# Altium PCB PCB1.PcbDoc (part 1 of 2)
Units mm, origin at the board's own origin, x right, y up, seen from the top; angles counter-clockwise.
Board outline 100 x 70 mm, 4 copper layers (Top Layer, Int1 (GND), Int2 (PWR), Bottom Layer), stack 1.334 mm thick; 109 components, 77 nets, 370 pads, 170 vias.
Unrouted connection lines stored in the file: 2.
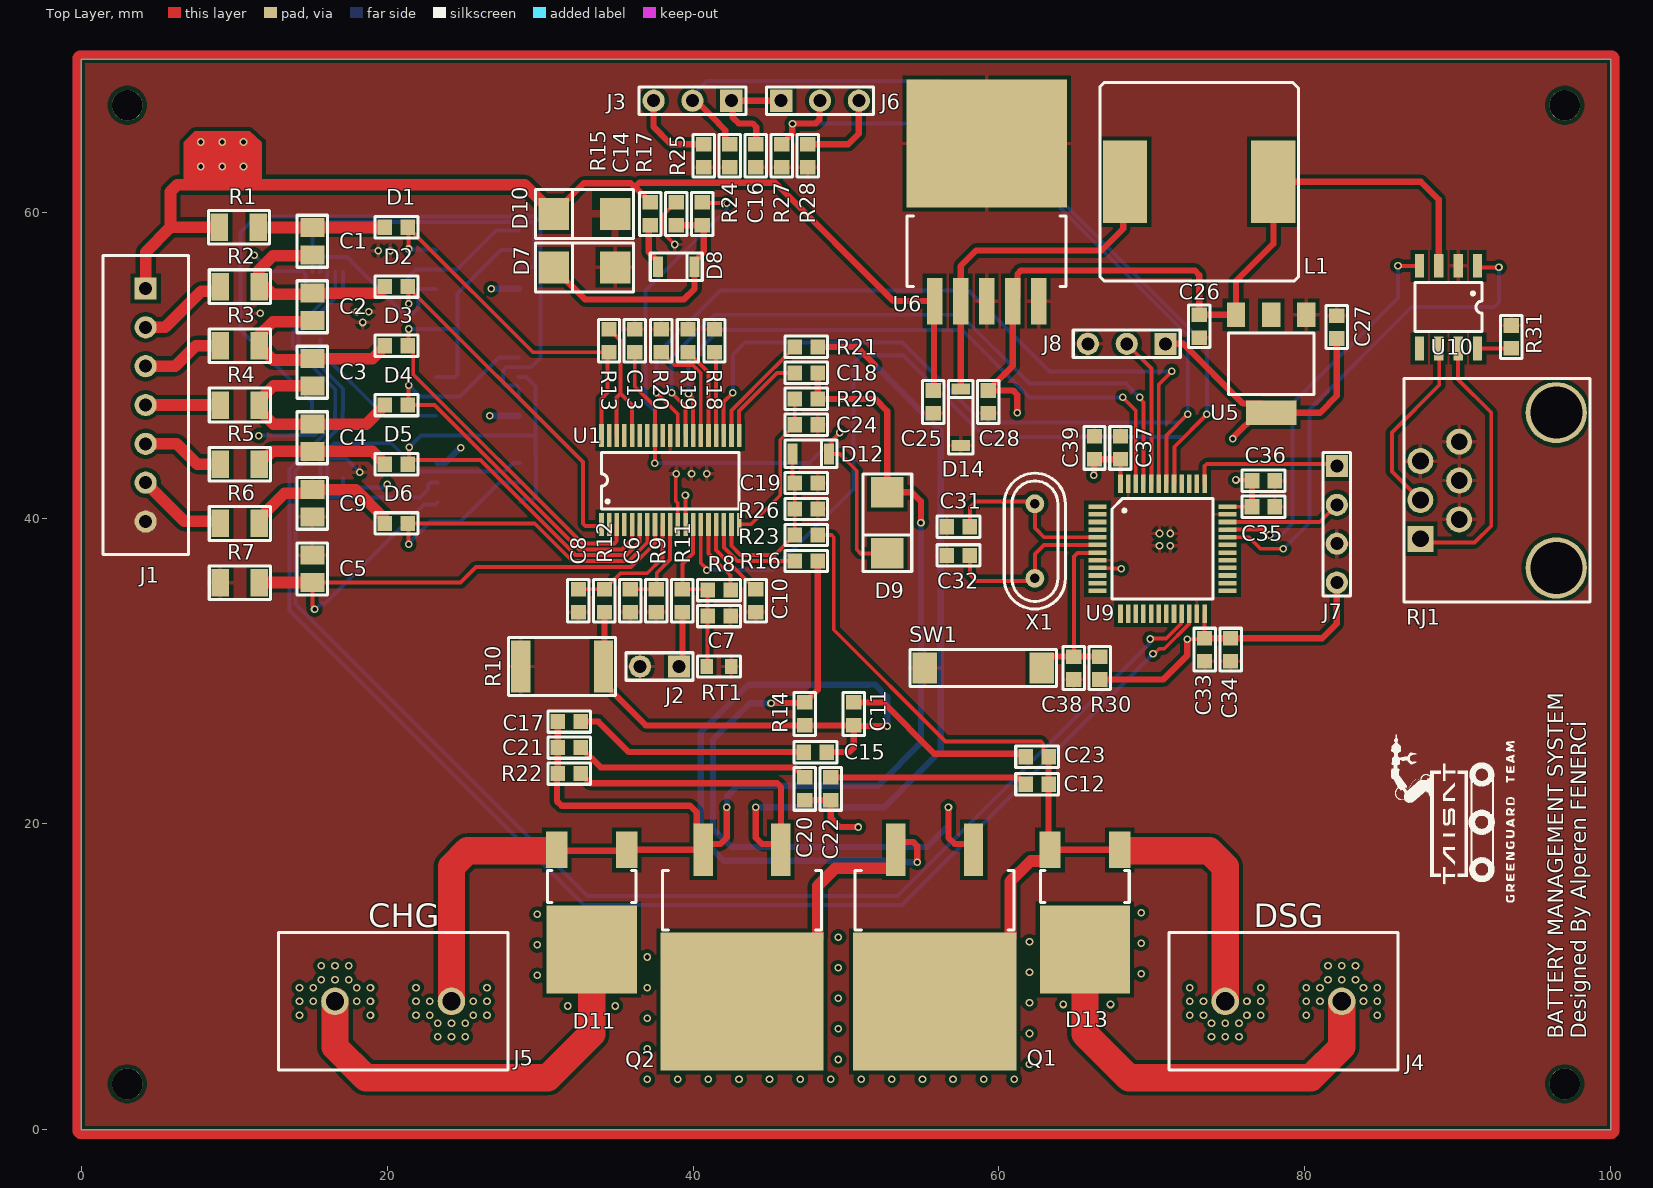
[diagram p0: Top Layer view]
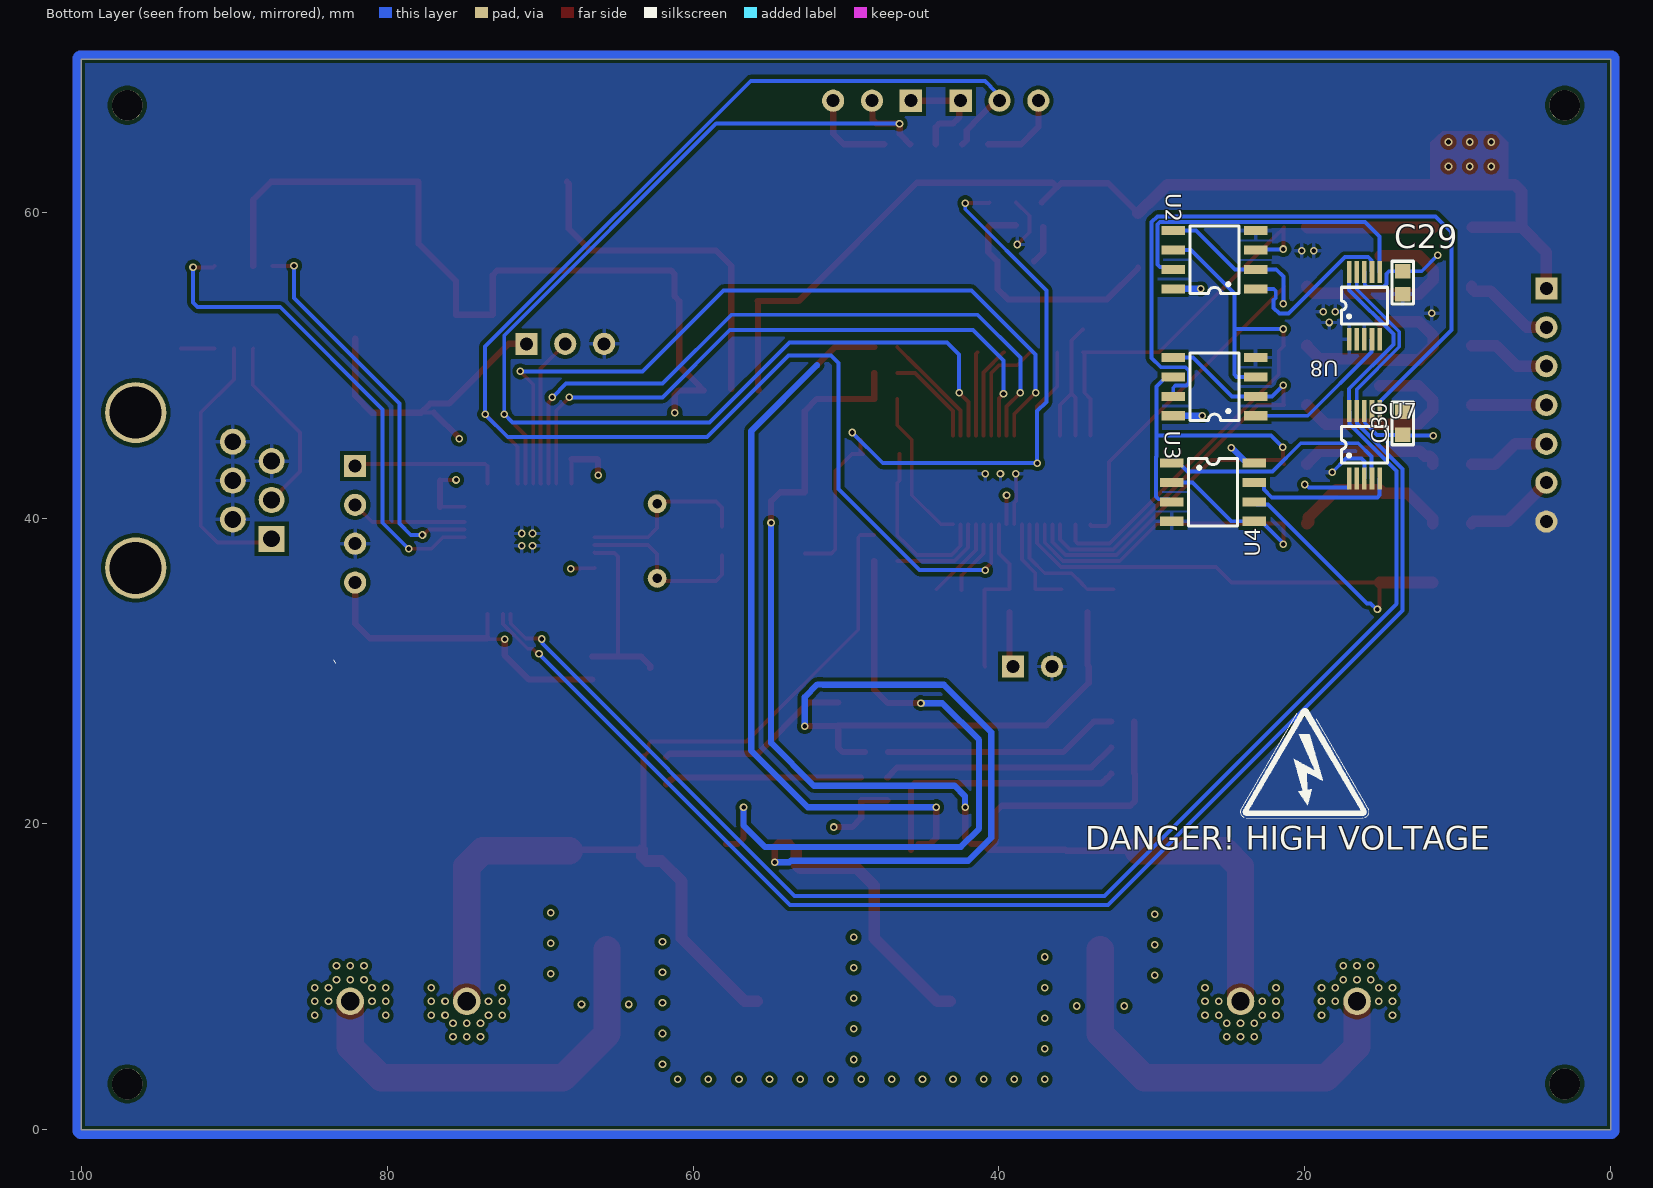
[diagram p1: Bottom Layer view, seen from below]
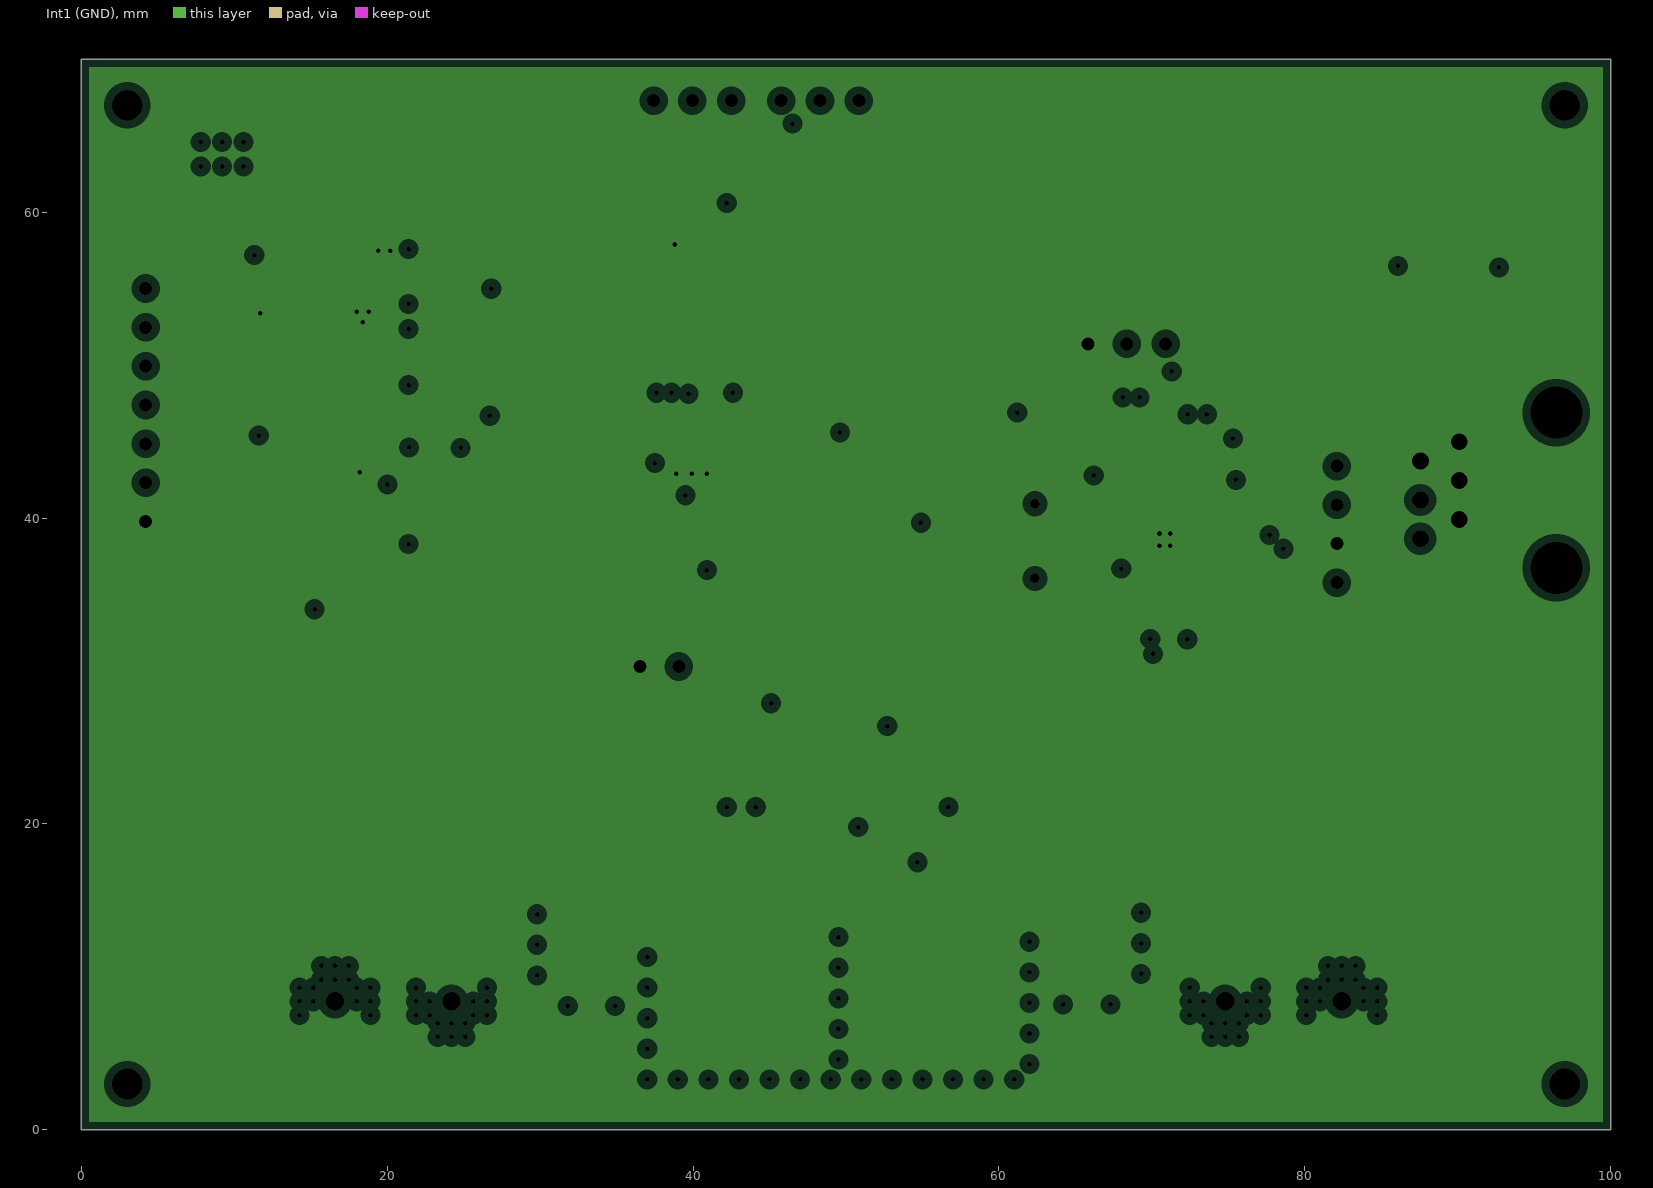
[diagram p2: Int1 (GND), clearances drawn from the general rule]
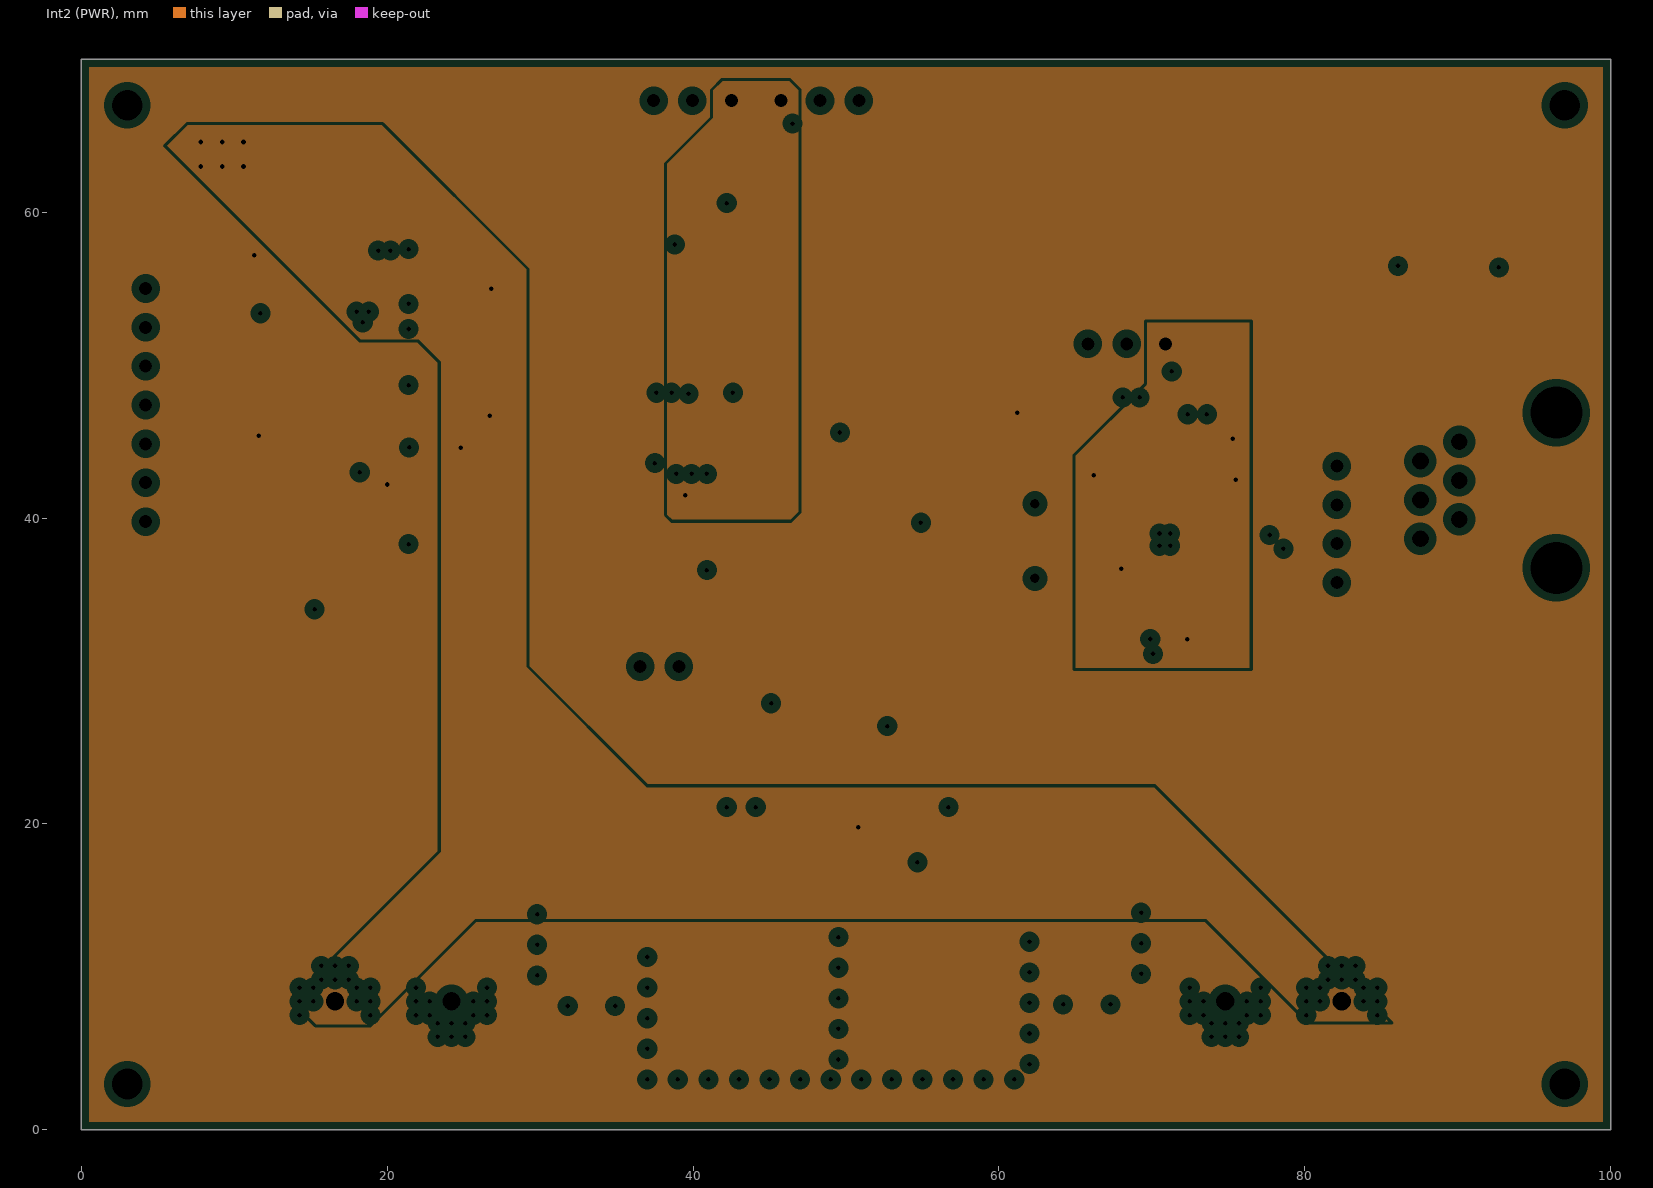
[diagram p3: Int2 (PWR), clearances drawn from the general rule]
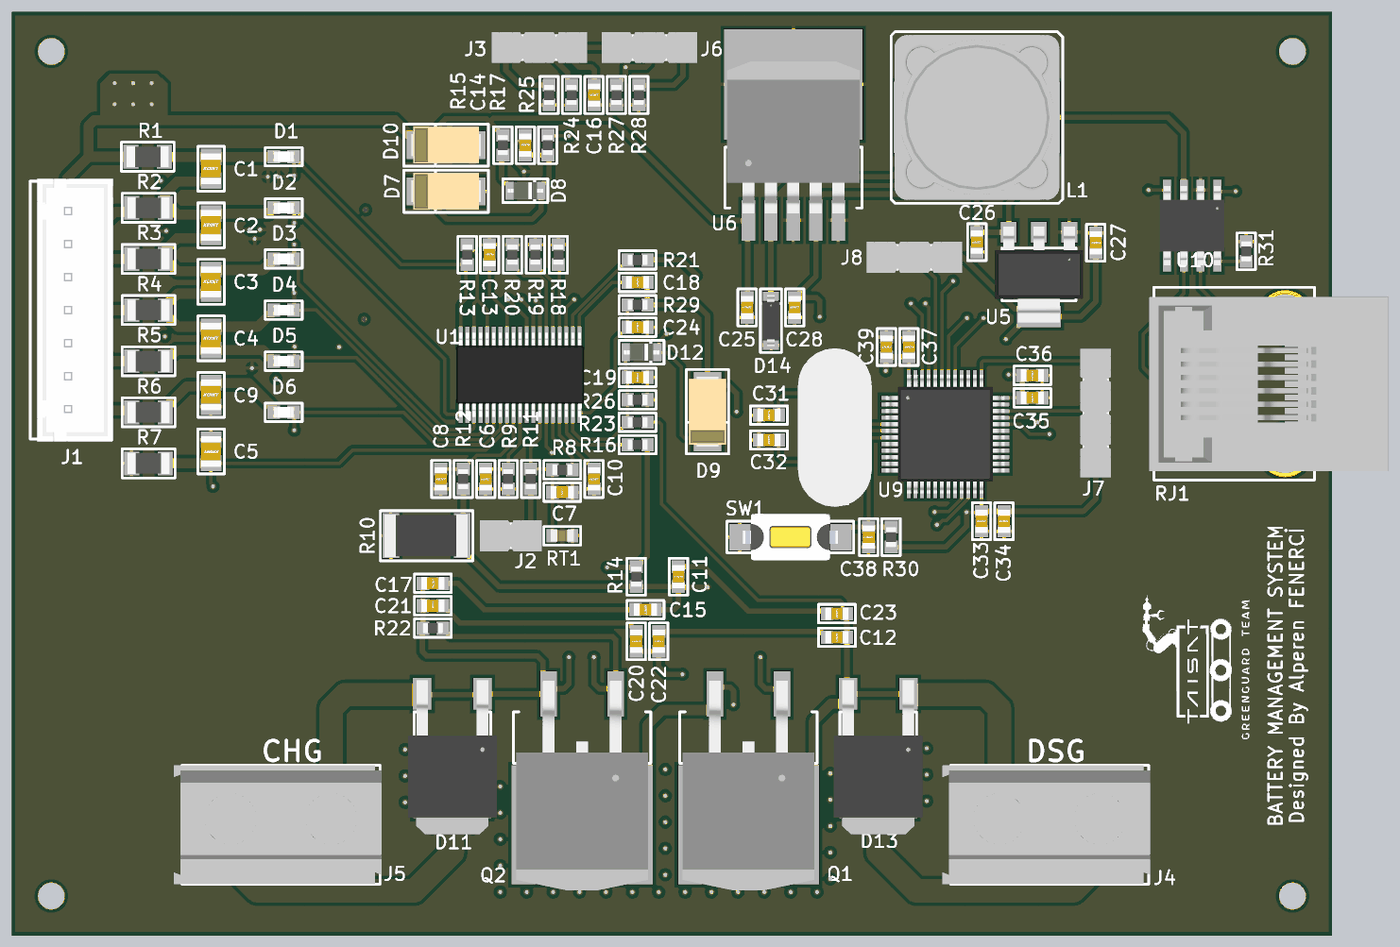
[diagram p4: 3D render of the assembled board from above, using the file's embedded part models]
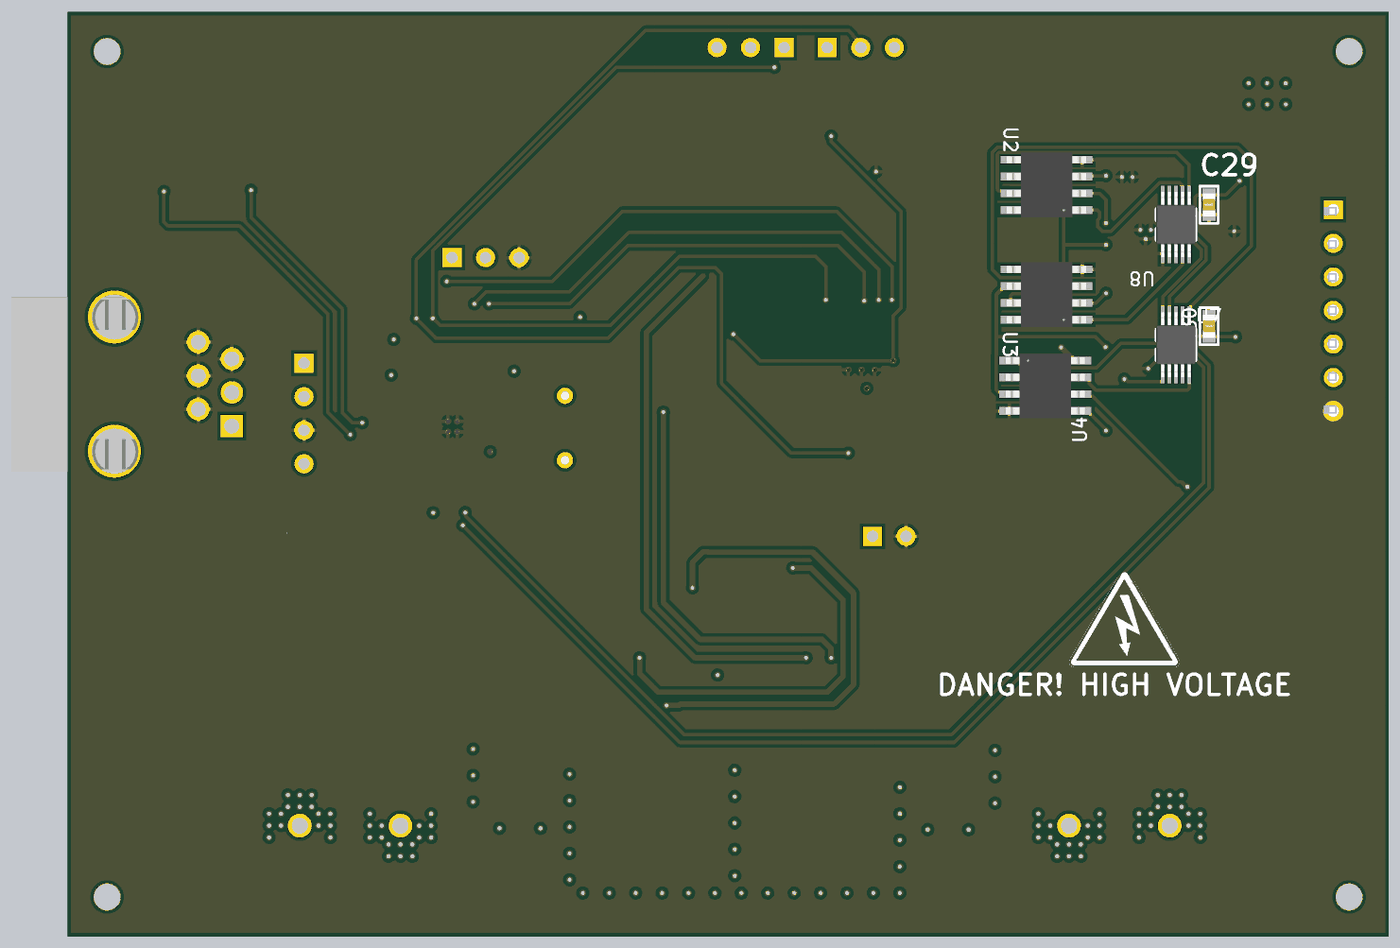
[diagram p5: 3D render of the assembled board from below, using the file's embedded part models]

## Layer stack, top to bottom
Top Solder: solder mask 0.0254, SM-001, Dk 4
Top Layer: signal copper 0.035
Dielectric 1: prepreg 0.1295, PP-017, Dk 4.3
Dielectric 2: prepreg 0.1295, PP-017, Dk 4.3
Int1 (GND): plane copper 0.0175, net GND
Dielectric 3: core 0.7112, Core-039, Dk 4.8
Int2 (PWR): plane copper 0.0175, net 5V
Dielectric 4: prepreg 0.1295, PP-017, Dk 4.3
Dielectric 5: prepreg 0.1295, PP-017, Dk 4.3
Bottom Layer: signal copper 0.035
Bottom Solder: solder mask 0.0254, SM-001, Dk 4

## Board outline
0,0 0,70 100,70 100,0

## Design rules (kind name [scope] priority, off if disabled: settings)
Clearance [All] p1: gap=0.254 ignorepadtopadclearanceinfootprint=TRUE except(0: Arc-Hole Track-Hole SMDPad-Hole THPad-Hole Via-Hole Fill-Hole Poly-Hole Region-Hole Text-Hole; 0.127: Arc-Arc Arc-Track Arc-SMDPad Track-Track Track-SMDPad SMDPad-SMDPad)
DiffPairsRouting [All] p1: maxlimit=0.254 minlimit=0.254 mostfreqgap=0.254 toplayer_minwidth=0.254 toplayer_maxwidth=0.381 toplayer_prefwidth=0.381 bottomlayer_minwidth=0.254 bottomlayer_maxwidth=0.381 bottomlayer_prefwidth=0.381 maxuncoupledlength=12.7
PlaneClearance [All] p1: clearance=0.508
PlaneConnect [All] p1: planeconnectstyle=Relief reliefexpansion=0.508 reliefentries=4 reliefconductorwidth=0.254 reliefairgap=0.254
PolygonConnect [All] p1: connectstyle=Relief reliefconductorwidth=0.254 reliefentries=4 polygonreliefangle="90 Angle" airgapwidth=0.254
RoutingVias [All] p1: holewidth=0.711 width=0.508 viastyle="Through Hole" minholewidth=0.3 minwidth=0.5 maxholewidth=1.016 maxwidth=1.27
SolderMaskExpansion [All] p1: expansion=0.102 istentingtop=FALSE
Width [All] p1: maxlimit=10.16 minlimit=0.254 preferedwidth=0.254 checkconnectedcopper=TRUE
27 further rules are at their usual default settings.

## Classes and differential pairs
component class BMS_MCU: C25 C26 C27 C28 C29 C30 C31 C32 C33 C34 C35 C36 C37 C38 C39 D14 J7 J8 L1 R30 R31 RJ1 SW1 U2 U3 U4 U5 U6 U7 U8 U9 U10 X1
component class BMS_Cell: C1 C2 C3 C4 C5 C6 C7 C8 C9 C10 C11 C12 C13 C14 C15 C16 C17 C18 C19 C20 C21 C22 C23 C24 D1 D2 D3 D4 D5 D6 D7 D8 D9 D10 D11 D12 D13 J1 J2 J3 J4 J5 J6 Q1 Q2 R1 R2 R3 R4 R5 R6 R7 R8 R9 R10 R11 R12 R13 R14 R15 R16 R17 R18 R19 R20 R21 R22 R23 R24 R25 R26 R27 R28 R29 RT1 U1

## Components (designator, comment, footprint, x,y, rotation, side; value= is the part's Value field where it differs from the comment)
C1 "1uF" "CAP 0805" 15.1,58.11 r270 top value=220nF
C2 "1uF" "CAP 0805" 15.1,53.826 r270 top value=220nF
C3 "1uF" "CAP 0805" 15.1,49.542 r270 top value=220nF
C4 "1uF" "CAP 0805" 15.1,45.258 r270 top value=220nF
C5 "1uF" "CAP 0805" 15.1,36.69 r90 top value=220nF
C6 "0.1uF" "CAP 0603" 35.9,34.6 r270 top value=10nF
C7 "10nF" "CAP 0603" 41.7,33.6 r0 top
C8 "0.1uF" "CAP 0603" 32.5,34.6 r270 top value=10nF
C9 "1uF" "CAP 0805" 15.1,40.974 r270 top value=220nF
C10 "1uF" "CAP 0603" 44.1,34.6 r270 top value=10nF
C11 "0.1uF" "CAP 0603" 50.5,27.2 r90 top value=10nF
C12 "0.1uF" "CAP 0603" 62.5,24.4 r180 top value=10nF
C13 "0.1uF" "CAP 0603" 36.187,51.6 r90 top value=10nF
C14 "10uF" "CAP 0603" 38.9,59.9 r90 top value=10nF
C15 "0.1uF" "CAP 0603" 48,24.7 r180 top value=10nF
C16 "4.7uF" "CAP 0603" 44.1,63.7 r270 top value=10nF
C17 "0.1uF" "CAP 0603" 31.9,26.7 r0 top value=10nF
C18 "1uF" "CAP 0603" 47.4,49.5 r0 top value=10nF
C19 "0.1uF" "CAP 0603" 47.4,42.3 r0 top value=10nF
C20 "0.1uF" "CAP 0603" 47.3,22.3 r90 top value=10nF
C21 "0.1uF" "CAP 0603" 31.9,25 r180 top value=10nF
C22 "0.1uF" "CAP 0603" 49,22.3 r90 top value=10nF
C23 "0.1uF" "CAP 0603" 62.5,22.6 r0 top value=10nF
C24 "0.1uF" "CAP 0603" 47.4,46.1 r0 top value=10nF
C25 "100uF" "CAP 0603" 55.7,47.6 r270 top value=10nF
C26 "100nF" "CAP 0603" 73.1,52.55 r270 top value=10nF
C27 "22uF" "CAP 0603" 82.1,52.5 r90 top value=10nF
C28 "330uF" "CAP 0603" 59.3,47.6 r270 top value=10nF
C29 "0.1uF" "CAP 0603" 13.6,55.4 r270 bottom value=10nF
C30 "0.1uF" "CAP 0603" 13.6,46.2 r90 bottom value=10nF
C31 "0.1uF" "CAP 0603" 57.35,39.44 r180 top value=10nF
C32 "0.1uF" "CAP 0603" 57.35,37.56 r180 top value=10nF
C33 "0.1uF" "CAP 0603" 73.45,31.4 r270 top value=10nF
C34 "0.1uF" "CAP 0603" 75.15,31.4 r270 top value=10nF
C35 "0.1uF" "CAP 0603" 77.3,40.75 r0 top value=10nF
C36 "0.1uF" "CAP 0603" 77.3,42.45 r0 top value=10nF
C37 "0.1uF" "CAP 0603" 67.95,44.6 r90 top value=10nF
C38 "0.1uF" "CAP 0603" 64.9,30.2 r270 top value=10nF
C39 "0.1uF" "CAP 0603" 66.25,44.6 r90 top value=10nF
D1 "LTW-C191TLA" "LED 0603" 20.6,59.02 r180 top
D2 "LTW-C191TLA" "LED 0603" 20.6,55.147 r180 top
D3 "LTW-C191TLA" "LED 0603" 20.6,51.273 r180 top
D4 "LTW-C191TLA" "LED 0603" 20.6,47.4 r180 top
D5 "LTW-C191TLA" "LED 0603" 20.6,43.527 r180 top
D6 "LTW-C191TLA" "LED 0603" 20.6,39.653 r180 top
D7 "SMAJ36A-HT" DO214AC 32.9,56.4 r0 top
D8 "1N4148WS-HT" SOD323 38.9,56.45 r180 top
D9 "SMAJ36A-HT" DO214AC 52.7,39.7 r90 top
D10 "SMAJ36A-HT" DO214AC 32.9,59.9 r0 top
D11 "BYQ28ED" DPAK 33.375,15.052 r180 top
D12 "1N4148WS-HT" SOD323 47.7,44.2 r180 top
D13 "BYQ28ED" DPAK 65.625,15.052 r180 top
D14 "1N5819HW-7-F" SOD123 57.5,46.6 r270 top
J1 "JST-XH-7" JST-XH-7 4.2,47.4 r270 top locked
J2 "146285-2" "HEADER 1x2" 37.8,30.3 r180 top
J3 "146285-3" "HEADER 1x3" 39.96,67.3 r180 top
J4 "282845-2" "Terminal 1x2" 78.61,8.4 r0 top
J5 "282845-2" "Terminal 1x2" 20.39,8.4 r0 top
J6 "146285-3" "HEADER 1x3" 48.3,67.3 r0 top
J7 "146285-4" "HEADER 1x4" 82.1,39.6 r270 top
J8 "146285-3" "HEADER 1x3" 68.36,51.4 r180 top
L1 "330uH" "INDUCTOR SMD" 73.1,62 r0 top value=33uH
Q1 "IRF540SPBF" D2PAK-3 55.8,13.357 r180 top
Q2 "IRF540SPBF" D2PAK-3 43.2,13.357 r180 top
R1 "500R" "RESISTOR 1206" 10.3,59.02 r0 top locked value=4.7kR
R2 "500R" "RESISTOR 1206" 10.36,55.147 r0 top locked value=4.7kR
R3 "500R" "RESISTOR 1206" 10.36,51.273 r0 top locked value=4.7kR
R4 "500R" "RESISTOR 1206" 10.36,47.4 r0 top locked value=4.7kR
R5 "500R" "RESISTOR 1206" 10.36,43.527 r0 top locked value=4.7kR
R6 "500R" "RESISTOR 1206" 10.36,39.653 r0 top locked value=4.7kR
R7 "500R" "RESISTOR 1206" 10.36,35.78 r0 top locked value=4.7kR
R8 "10K" "RESISTOR 0603" 41.7,35.3 r180 top value=1kR
R9 "1K" "RESISTOR 0603" 37.6,34.6 r90 top value=1kR
R10 "0.002R Shunt" "RESISTOR 2512" 31.43,30.3 r0 top value=4.7kR
R11 "50R" "RESISTOR 0603" 39.3,34.6 r270 top value=1kR
R12 "1K" "RESISTOR 0603" 34.2,34.6 r90 top value=1kR
R13 "100R" "RESISTOR 0603" 34.5,51.6 r90 top value=1kR
R14 "5.1M" "RESISTOR 0603" 47.3,27.2 r90 top value=1kR
R15 "200R" "RESISTOR 0603" 37.2,59.9 r90 top value=1kR
R16 "1K" "RESISTOR 0603" 47.4,37.2 r180 top value=1kR
R17 "100R" "RESISTOR 0603" 40.6,59.9 r270 top value=1kR
R18 "1K" "RESISTOR 0603" 41.4,51.6 r270 top value=1kR
R19 "1K" "RESISTOR 0603" 39.662,51.6 r270 top value=1kR
R20 "1K" "RESISTOR 0603" 37.925,51.6 r270 top value=1kR
R21 "1K" "RESISTOR 0603" 47.4,51.2 r180 top value=1kR
R22 "5.1M" "RESISTOR 0603" 31.9,23.3 r0 top value=1kR
R23 "100R" "RESISTOR 0603" 47.4,38.9 r180 top value=1kR
R24 "1K" "RESISTOR 0603" 42.4,63.7 r90 top value=1kR
R25 "1K" "RESISTOR 0603" 40.7,63.7 r90 top value=1kR
R26 "47K" "RESISTOR 0603" 47.4,40.6 r180 top value=1kR
R27 "1K" "RESISTOR 0603" 45.8,63.7 r90 top value=1kR
R28 "1K" "RESISTOR 0603" 47.5,63.7 r90 top value=1kR
R29 "100R" "RESISTOR 0603" 47.4,47.8 r180 top value=1kR
R30 "1K" "RESISTOR 0603" 66.6,30.2 r270 top value=1kR
R31 "10K" "RESISTOR 0603" 93.5,51.85 r270 top value=1kR
RJ1 "DS1133-03-S60BX" RJ11,RJ12,RJ14,RJ25 92.005,41.825 r90 top
RT1 "10K" "NTC 0603" 41.7,30.3 r0 top value=10kR
SW1 "DTSMF-31R" "SWITCH 6.00 x 3.5 - 2" 58.975,30.2 r0 top
U1 "BQ77908" TSSOP-38 38.51,42.496 r90 top
U2 "TL3472CDR" SOIC-8 25.9,56.9 r0 bottom
U3 "TL3472CDR" SOIC-8 25.9,48.6 r0 bottom
U4 "TL3472CDR" SOIC-8 26,41.7 r180 bottom
U5 "AMS1117-3V3" SOT223-3 77.8,50.1 r180 top
U6 "LM2575-5V" D2PAK-5 59.2,59.348 r0 top
U7 "ADS1015" VSSOP-10 16.1,44.8 r90 bottom
U8 "ADS1015" VSSOP-10 16.1,53.9 r90 bottom
U9 "STM32F103x8" LQFP48 70.7,38 r270 top
U10 "MCP2551T-I" SOIC-8 89.4,53.8 r270 top
X1 "CRYSTAL" "CRYSTAL THT" 62.35,38.5 r270 top

## Footprints (in the part's own frame and the unit in brackets; to place one, negate y for a bottom-side part, rotate by r counter-clockwise, add the part's x,y. Pads: shape width x height; smd on the part's side, far side on the other; paste and mask are expansions set on the pad)
"CAP 0603" [mm]
  rect 0.95x1 smd mask+0.05: 1(-0.75,0) 2(0.75,0)
  silkscreen extent -1.4,-0.7 1.4,0.7, body extent -0.88,-0.47 0.88,0.48, height 0.95
"CAP 0805" [mm]
  rect 1.24x1.56 smd mask+0.05: 1(-0.89,0) 2(0.89,0)
  silkscreen extent -1.7,-1 1.7,1, body extent -1.18,-0.77 1.17,0.77, height 1.45
"CRYSTAL THT" [mm]
  round 1.23 hole 0.63 mask+0.05: 1(-2.44,0) 2(2.44,0)
  silkscreen extent -4.44,-2 4.44,2, body extent -6,-2.8 6,2.79, height 3.5
D2PAK-3 [mil] "TO263-3"
  rect 49.49x135 smd mask+1.97: 1(-100,-195.17) 2(100,-195.17)
  rect 420x355 smd mask+1.97: 3(0,195.17)
  silkscreen extent -205,-142 205,12, body extent -196,-235 196,390, height 191
D2PAK-5 [mm] "TO-263-5"
  rect 1.016x3.05 smd mask+0.05: 1(-3.404,-5.152) 2(-1.702,-5.152) 3(0,-5.152) 4(1.702,-5.152) 5(3.404,-5.152)
  rect 10.49x8.38 smd mask+0.05: 3(0,5.153)
  silkscreen extent -5.2,-4.2 5.2,0.4, body extent -5.02,-4.63 5.02,6.9, height 4.59
DO214AC [mm] "SMA"
  rect 2x2.1 smd mask+0.05: 1(-2,0) 2(2,0)
  silkscreen extent -3.2,-1.6 3.2,1.6, body extent -2.64,-1.4 2.64,1.4, height 2.34
DPAK [mm]
  rect 1.4x2.4 smd mask+0.05: 1(-2.285,-3.263) 3(2.285,-3.263)
  rect 5.9x5.75 smd mask+0.05: 2(0,3.263)
  silkscreen extent -2.9,-1.9 2.9,0.2, body extent -3.37,-4.3 3.37,7.38, height 2.41
"HEADER 1x2" [mm]
  rect 1.45x1.45 hole 0.85 mask+0.05: 1(-1.27,0)
  round 1.45 hole 0.85 mask+0.05: 2(1.27,0)
  silkscreen extent -2.2,-0.9 2.2,0.9, body extent -2.34,-1.17 2.34,1.17, height 4.58
"HEADER 1x3" [mm]
  rect 1.45x1.45 hole 0.85 mask+0.05: 1(-2.54,0)
  round 1.45 hole 0.85 mask+0.05: 2(0,0) 3(2.54,0)
  silkscreen extent -3.5,-0.9 3.5,0.9, body extent -3.61,-1.17 3.61,1.17, height 4.58
"HEADER 1x4" [mm]
  rect 1.45x1.45 hole 0.85 mask+0.05: 1(-3.81,0)
  round 1.45 hole 0.85 mask+0.05: 2(-1.27,0) 3(1.27,0) 4(3.81,0)
  silkscreen extent -4.7,-0.9 4.7,0.9, body extent -4.88,-1.17 4.88,1.17, height 4.58
"INDUCTOR SMD" [mm]
  rect 2.9x5.4 smd mask+0.05: 1(-4.85,0) 2(4.85,0)
  silkscreen extent -6.5,-6.5 6.5,6.5, body extent -6.25,-6.25 6.25,6.25, height 6
JST-XH-7 [mm] "2.54mm"
  rect 1.45x1.45 hole 0.85 mask+0.05: 1(-7.62,0)
  round 1.45 hole 0.85 mask+0.05: 2(-5.08,0) 3(-2.54,0) 4(0,0) 5(2.54,0) 6(5.08,0) 7(7.62,0)
  silkscreen extent -9.77,-2.8 9.77,2.8, body extent -9.95,-2.28 9.95,3.47, height 7
"LED 0603" [mm]
  rect 0.95x1 smd mask+0.05: 1(-0.75,0) 2(0.75,0)
  silkscreen extent -1.4,-0.7 1.4,0.7, body extent -0.8,-0.4 0.8,0.4, height 0.65
LQFP48 [mm]
  rect 0.3x1.2 smd mask+0.05: 1(-2.75,-4.25) 2(-2.25,-4.25) 3(-1.75,-4.25) 4(-1.25,-4.25) 5(-0.75,-4.25) 6(-0.25,-4.25) 7(0.25,-4.25) 8(0.75,-4.25) 9(1.25,-4.25) 10(1.75,-4.25) 11(2.25,-4.25) 12(2.75,-4.25) 25(2.75,4.25) 26(2.25,4.25) 27(1.75,4.25) 28(1.25,4.25) 29(0.75,4.25) 30(0.25,4.25) 31(-0.25,4.25) 32(-0.75,4.25) 33(-1.25,4.25) 34(-1.75,4.25) 35(-2.25,4.25) 36(-2.75,4.25)
  rect 1.2x0.3 smd mask+0.05: 13(4.25,-2.75) 14(4.25,-2.25) 15(4.25,-1.75) 16(4.25,-1.25) 17(4.25,-0.75) 18(4.25,-0.25) 19(4.25,0.25) 20(4.25,0.75) 21(4.25,1.25) 22(4.25,1.75) 23(4.25,2.25) 24(4.25,2.75) 37(-4.25,2.75) 38(-4.25,2.25) 39(-4.25,1.75) 40(-4.25,1.25) 41(-4.25,0.75) 42(-4.25,0.25) 43(-4.25,-0.25) 44(-4.25,-0.75) 45(-4.25,-1.25) 46(-4.25,-1.75) 47(-4.25,-2.25) 48(-4.25,-2.75)
  silkscreen extent -3.3,-3.3 3.3,3.3, body extent -4.5,-4.5 4.5,4.5, height 1.6
"NTC 0603" [mm]
  rect 0.8x1 smd mask+0.05: 1(-0.8,0) 2(0.8,0)
  silkscreen extent -1.4,-0.7 1.4,0.7, body extent -0.88,-0.44 0.88,0.44, height 0.89
"RESISTOR 0603" [mm]
  rect 0.95x1 smd mask+0.05: 1(-0.75,0) 2(0.75,0)
  silkscreen extent -1.4,-0.7 1.4,0.7, body extent -0.76,-0.38 0.76,0.38, height 0.36
"RESISTOR 1206" [mm]
  rect 1.15x1.8 smd mask+0.05: 1(-1.275,0) 2(1.275,0)
  silkscreen extent -2,-1.1 2,1.1, body extent -1.6,-0.8 1.6,0.8, height 0.64
"RESISTOR 2512" [mm]
  rect 1.25x3.4 smd mask+0.05: 1(-2.7,0) 2(2.7,0)
  silkscreen extent -3.5,-1.9 3.5,1.9, body extent -3.2,-1.6 3.1,1.6, height 0.71
RJ11,RJ12,RJ14,RJ25 [mm] "6P6C"
  rect 1.7x1.7 hole 1.1 mask+0.05: 1(-3.175,4.445)
  round 1.7 hole 1.1 mask+0.05: 2(-0.635,4.445) 3(1.905,4.445) 4(-1.905,1.905) 5(0.635,1.905) 6(3.175,1.905)
  round 4 hole 3.4 mask+0.05: ""(-5.08,-4.445) ""(5.08,-4.445)
  silkscreen extent -7.3,-6.66 7.3,5.5, body extent -6.64,-12.26 6.57,5.84, height 11.75
SOD123 [mm]
  rect 0.7x1.2 smd mask+0.05: 1(-1.85,0) 2(1.85,0)
  silkscreen extent -2.4,-0.8 2.4,0.8, body extent -1.92,-0.67 1.92,0.67, height 0.81
SOD323 [mm]
  rect 0.65x1.35 smd mask+0.05: 1(-1.2,0) 2(1.2,0)
  silkscreen extent -1.7,-0.9 1.7,0.9, body extent -1.34,-0.65 1.34,0.65, height 0.94
SOIC-8 [mm]
  rect 1.55x0.6 smd mask+0.05: 1(-2.7,1.905) 2(-2.7,0.635) 3(-2.7,-0.635) 4(-2.7,-1.905) 5(2.7,-1.905) 6(2.7,-0.635) 7(2.7,0.635) 8(2.7,1.905)
  silkscreen extent -1.6,-2.2 1.6,2.2, body extent -3,-2.45 3,2.45, height 1.76
SOT223-3 [mm]
  rect 1.2x1.6 smd mask+0.05: 1(-2.3,-3.2) 2(0,-3.2) 3(2.3,-3.2)
  rect 3.3x1.6 smd mask+0.05: 2(0,3.2)
  silkscreen extent -2.8,-2 2.8,2, body extent -3.35,-3.64 3.35,3.64, height 1.81
"SWITCH 6.00 x 3.5 - 2" [mm]
  rect 1.6x2 smd mask+0.05: 1(-3.825,0) 2(3.825,0)
  silkscreen extent -4.8,-1.2 4.8,1.2, body extent -3.6,-1.76 3.6,1.76, height 4.12
"Terminal 1x2" [mm]
  round 1.8 hole 1.2 mask+0.05: 1(-3.81,0) 2(3.81,0)
  silkscreen extent -7.5,-4.5 7.5,4.5, body extent -8.12,-4.5 7.62,4.5, height 15.5
TSSOP-38 [mm]
  rect 1.5x0.3 smd mask+0.05: 1(-2.9,4.5) 2(-2.9,4) 3(-2.9,3.5) 4(-2.9,3) 5(-2.9,2.5) 6(-2.9,2) 7(-2.9,1.5) 8(-2.9,1) 9(-2.9,0.5) 10(-2.9,0) 11(-2.9,-0.5) 12(-2.9,-1) 13(-2.9,-1.5) 14(-2.9,-2) 15(-2.9,-2.5) 16(-2.9,-3) 17(-2.9,-3.5) 18(-2.9,-4) 19(-2.9,-4.5) 20(2.9,-4.5) 21(2.9,-4) 22(2.9,-3.5) 23(2.9,-3) 24(2.9,-2.5) 25(2.9,-2) 26(2.9,-1.5) 27(2.9,-1) 28(2.9,-0.5) 29(2.9,0) 30(2.9,0.5) 31(2.9,1) 32(2.9,1.5) 33(2.9,2) 34(2.9,2.5) 35(2.9,3) 36(2.9,3.5) 37(2.9,4) 38(2.9,4.5)
  silkscreen extent -1.9,-4.5 1.8,4.5, body extent -3.2,-4.85 3.2,4.85, height 1.13
VSSOP-10 [mm]
  rect 1.45x0.3 smd mask+0.05: 1(-2.2,1) 2(-2.2,0.5) 3(-2.2,0) 4(-2.2,-0.5) 5(-2.2,-1) 6(2.2,-1) 7(2.2,-0.5) 8(2.2,0) 9(2.2,0.5) 10(2.2,1)
  silkscreen extent -1.2,-1.5 1.2,1.5, body extent -2.46,-1.5 2.46,1.5, height 1.11

## Part data
C1 C2 C3 C4 C5 C9: library part "CAP 0805", "Multilayer Ceramic Capacitor", Case Code (Imperial)=0805, Case Code (Metric)=2012, Dielectric=X7R, Dielectric Material=Ceramic, Manufacturer=KEMET, Manufacturer Part Number=C0805C224K5RACTU, Max Operating Temperature=125°C, Min Operating Temperature=-55°C, Package Quantity=4000, Supplier Part Number=80-C0805C224K5R, Temperature Coefficient=30ppm/°C, Tolerance=10%, Voltage=50V, Case/Package=0805, Category="Ceramic Capacitors", Construction=Flat, Created By=Kaptanyum, Depth=1.25mm, Dissipation Factor=2.5%, Height=1.1mm, Lead Free=5697LeadFree, Lead Pitch=0.75mm, Length=2mm, Material=4241ConductorMaterial, Mounting Technology="Surface Mount,PCB", Packaging="Tape and Reel", Pricing="1=0.15, 10=0.084, 50=0.084, 100=0.053, 1000=0.035, 10000=0.026 (USD)", Radiation Hardening=No, Reach SVHC Compliant=No, RoHS=Yes, RoHS Compliant=Yes, Series="SMD Comm X7R", Stock=89467, Supplier=Mouser, Termination=SMD/SMT, Voltage Rating=50V, Voltage Rating (DC)=50V, Width=1.2mm
C6 C7 C8 C10 C11 C12 C13 C14 C15 C16 C17 C18 C19 C20 C21 C22 C23 C24 C25 C26 C27 C28 C29 C30 C31 C32 C33 C34 C35 C36 C37 C38 C39: library part "CAP 0603", "Multilayer Ceramic Capacitor", Case Code (Imperial)=0603, Case Code (Metric)=1608, Dielectric=X7R, Manufacturer=KEMET, Manufacturer Part Number=C0603C103K5RACTU, Max Operating Temperature=125°C, Min Operating Temperature=-55°C, Package Quantity=4000, Supplier Part Number=80-C0603C103K5R, Temperature Coefficient=30ppm/°C, Tolerance=10%, Voltage=50V, Case/Package=0603, Category="Ceramic Capacitors", Construction=Flat, Created By=Kaptanyum, Depth=0.8mm, Dissipation Factor=2.5%, Height=0.8mm, Lead Free=5697LeadFree, Lead Pitch=0.7mm, Length=1.6mm, Material=4241ConductorMaterial, Mounting Technology="PCB,Surface Mount", Packaging="Tape and Reel", Pins=2, Pricing="1=0.1, 10=0.047, 50=0.047, 100=0.026, 1000=0.017, 10000=0.012 (USD)", Radiation Hardening=No, Reach SVHC Compliant=No, RoHS=Yes, RoHS Compliant=Yes, Series=C0603C, Stock=1110922, Supplier=Mouser, Termination=SMD/SMT, Voltage Rating=50V, Voltage Rating (DC)=50V, Width=0.8mm
D1 D2 D3 D4 D5 D6: library part "LED 0603", "Chip LED", Case Code (Imperial)=0603, Case Code (Metric)=1608, Color=Green, Forward Current=30mA, Forward Voltage=2.1V, Lens Color=Colorless, Manufacturer="Vishay Lite-On", Manufacturer Part Number=LTST-C190GKT, Max Operating Temperature=85°C, Min Operating Temperature=-55°C, Package Quantity=1, Power Dissipation=100mW, Reverse Voltage=5V, Test Current=10mA, Voltage=2V, Case/Package=0603, Category=LEDs, ComponentLink1Description=https://datasheet.ciiva.com/2109/ltst-c190gkt-2109985.pdf?src-supplier=Digi-Key, ComponentLink1URL=https://datasheet.ciiva.com/2109/ltst-c190gkt-2109985.pdf?src-supplier=Digi-Key, ComponentLink2Description=https://datasheet.ciiva.com/11775/0900766b80dc02a6-11775616.pdf?src-supplier=Rs, ComponentLink2URL=https://datasheet.ciiva.com/11775/0900766b80dc02a6-11775616.pdf?src-supplier=Rs, ComponentLink3Description=https://datasheet.ciiva.com/12403/lite-on-ltst-c190gkt-187204-12403884.pdf?src-supplier=Mouser, ComponentLink3URL=https://datasheet.ciiva.com/12403/lite-on-ltst-c190gkt-187204-12403884.pdf?src-supplier=Mouser, ComponentLink4Description=https://datasheet.ciiva.com/16392/lite-on20ltst-c190gkt-16392818.pdf?src-supplier=Future+Electronics, ComponentLink4URL=https://datasheet.ciiva.com/16392/lite-on20ltst-c190gkt-16392818.pdf?src-supplier=Future+Electronics, ComponentLink5Description=https://datasheet.ciiva.com/2109/ltst-c190gkt-2109986.pdf?src-supplier=Digi-Key, ComponentLink5URL=https://datasheet.ciiva.com/2109/ltst-c190gkt-2109986.pdf?src-supplier=Digi-Key, ComponentLink6Description=https://datasheet.ciiva.com/2109/ltst-c190gkt-2109987.pdf?src-supplier=Digi-Key, ComponentLink6URL=https://datasheet.ciiva.com/2109/ltst-c190gkt-2109987.pdf?src-supplier=Digi-Key, Created By=Kaptanyum, Depth=0.8mm, Dominant Wavelength=569nm, Height=0.9mm, Illumination Color=Green, Lead Free="Lead Free", Length=1.6mm, Lens Size=0.8mm, Lens Style=Flat,Diffused,Colorless,Rectangular,Clear, Lens Transparency=Clear, Luminous Intensity=6mcd, Mounting Technology="Surface Mount", Number of Elements=1, Number of LEDs=1, Packaging="Tape and Reel", Pins=2, Power Rating=100mW, Pricing="4000=0.0455, 12000=0.034, 100000=0.0267 (USD)", Radiation Hardening=No, RoHS=Yes, RoHS Compliant=Yes, Series=-, Stock=36000, Supplier="Arrow Electronics", Supplier Part Number=LTST-C190GKT, Viewing Angle=130°, Wavelength=565nm, Width=0.8mm
D7 D9 D10: "Diode TVS 36V", Breakdown Voltage=40V, Case/Package=DO-214AC, Clamping Voltage=58.1V, Manufacturer="Vishay Semiconductors", Manufacturer Part Number=SMAJ36AHE3/61, Max Breakdown Voltage=44.2V, Max Forward Surge Current (Ifsm)=40A, Max Operating Temperature=150°C, Max Power Dissipation=400W, Max Reverse Leakage Current=1uA, Max Surge Current=6.9A, Min Operating Temperature=-55°C, Operating Supply Voltage=36V, Package Quantity=1800, Power Line Protection=No, Supplier Part Number=SMAJ36AHE3/61DKR-ND, Test Current=1mA, Category="TVS Diodes", Clamping Voltage-Max=58.1V, ComponentLink1Description=http://www.mouser.com/ds/2/427/smaj50a-241759.pdf?src-supplier=Mouser, ComponentLink1URL=http://www.mouser.com/ds/2/427/smaj50a-241759.pdf?src-supplier=Mouser, ComponentLink2Description=http://www.vishay.com/docs/88390/smaj50a.pdf?src-supplier=Digi-Key, ComponentLink2URL=http://www.vishay.com/docs/88390/smaj50a.pdf?src-supplier=Digi-Key, ComponentLink3Description=http://www.vishay.com/docs/88390/88390.pdf?src-supplier=Avnet, ComponentLink3URL=http://www.vishay.com/docs/88390/88390.pdf?src-supplier=Avnet, ComponentLink4Description=http://www.vishay.com/doc?88390?src-supplier=Future+Electronics, ComponentLink4URL=http://www.vishay.com/doc?88390?src-supplier=Future+Electronics, Diode Type=ZENER, Direction=Unidirectional, Lead Free="Lead Free", Min Breakdown Voltage=40V, Number of Channels=1, Number of Unidirectional Channels=1, Packaging="Tape and Reel", Peak Pulse Current=6.9A, Peak Pulse Power=400W, Pins=2, Polarity=Unidirectional, Power Dissipation=400W, Reverse Standoff Voltage=36V, RoHS=Yes, RoHS Compliant=Yes, Series="Automotive, AEC-Q101, TransZorb®", Supplier=Digi-Key, Termination=SMD/SMT
D8 D12: "Diode Switch 75V"
D11 D13: "Diode Array Rectifier", Case/Package=DPAK, Manufacturer="NXP Semiconductors", Manufacturer Part Number=BYQ28ED-200/T3, Max Operating Temperature=150°C, Max Reverse Current=10uA, Max Surge Current=55A, Min Operating Temperature=-40°C, Package Quantity=2500, Reverse Voltage=200V, Supplier Part Number=771-BYQ28ED-200/T3, Category=Uncategorized, ComponentLink1Description=http://www.nxp.com/pip/BYQ28ED-200?src-supplier=Mouser, ComponentLink1URL=http://www.nxp.com/pip/BYQ28ED-200?src-supplier=Mouser, Created By=Kaptanyum, Packaging="Tape and Reel", Recovery Time=25ns, RoHS=Yes, RoHS Compliant=Yes, Supplier=Mouser
D14: "Diode Schottky 40V", Average Rectified Current=1A, Case/Package=SOD-123-2, Forward Voltage=450mV, Manufacturer=Diodes, Max Forward Surge Current (Ifsm)=25A, Max Operating Temperature=125°C, Max Power Dissipation=450mW, Max Repetitive Reverse Voltage (Vrrm)=40V, Max Reverse Current=50uA, Min Operating Temperature=-65°C, Package Quantity=3000, Supplier Part Number=5349287, Category="Rectifier Diodes", ComponentLink1Description=https://datasheet.ciiva.com/27092/1538419-27092484.pdf?src-supplier=Jameco, ComponentLink1URL=https://datasheet.ciiva.com/27092/1538419-27092484.pdf?src-supplier=Jameco, ComponentLink2Description=https://datasheet.ciiva.com/16303/ds30217-16303296.pdf?src-supplier=Future+Electronics, ComponentLink2URL=https://datasheet.ciiva.com/16303/ds30217-16303296.pdf?src-supplier=Future+Electronics, ComponentLink3Description=https://datasheet.ciiva.com/8303/ds30217-8303132.pdf?src-supplier=Avnet, ComponentLink3URL=https://datasheet.ciiva.com/8303/ds30217-8303132.pdf?src-supplier=Avnet, ComponentLink4Description=https://datasheet.ciiva.com/912/ds30217-912802.pdf?src-supplier=Digi-Key, ComponentLink4URL=https://datasheet.ciiva.com/912/ds30217-912802.pdf?src-supplier=Digi-Key, ComponentLink5Description=https://datasheet.ciiva.com/912/ds30217-912803.pdf?src-supplier=Digi-Key, ComponentLink5URL=https://datasheet.ciiva.com/912/ds30217-912803.pdf?src-supplier=Digi-Key, ComponentLink6Description=https://datasheet.ciiva.com/912/ds30217-912801.pdf?src-supplier=Digi-Key, ComponentLink6URL=https://datasheet.ciiva.com/912/ds30217-912801.pdf?src-supplier=Digi-Key, ComponentLink7Description=https://datasheet.ciiva.com/1177/ds30217-1177089.pdf?src-supplier=Element14, ComponentLink7URL=https://datasheet.ciiva.com/1177/ds30217-1177089.pdf?src-supplier=Element14, Created By=Kaptanyum, Current Rating=1A, Forward Current=1A, Height=1.25mm, Lead Free="Lead Free", Length=2.85mm, Manufacturer Part Number=1N5819HW-7-F, Max Reverse Voltage (DC)=40V, Output Current=1A, Packaging="Tape and Reel", Peak Non-Repetitive Surge Current=25A, Pins=2, Polarity=Standard, Pricing="3000=0.0539, 12000=0.0516, 30000=0.0488, 45000=0.0495, 75000=0.0487, 120000=0.0453, 150000=0.0462 (USD)", Radiation Hardening=No, Reach SVHC Compliant=No, Reverse Voltage=40V, RoHS=Yes, RoHS Compliant=Yes, Series=-, Stock=3234000, Supplier="Future Electronics", Termination=SMD/SMT, Voltage Rating (DC)=40V, Weight=0.000353oz, Width=1.7mm
J1: "JST Socket for PCB", Color=Natural, Contact Resistance=20mR, Current Rating=3A, Flammability Rating="UL94 V-0", Housing Color=White, Insulation Resistance=1GR, Manufacturer=JST, Manufacturer Part Number=B4B-XH-A(LF)(SN), Max Operating Temperature=85°C, Max Voltage Rating (AC)=250V, Min Operating Temperature=-25°C, Category="Headers and Wire Housings", ComponentLink1Description=https://datasheet.ciiva.com/16203/b4b-xh-alfsn-16203642.pdf?src-supplier=Future+Electronics, ComponentLink1URL=https://datasheet.ciiva.com/16203/b4b-xh-alfsn-16203642.pdf?src-supplier=Future+Electronics, ComponentLink2Description=https://datasheet.ciiva.com/26894/getdatasheetpartid-455616-26894787.pdf?src-supplier=Verical, ComponentLink2URL=https://datasheet.ciiva.com/26894/getdatasheetpartid-455616-26894787.pdf?src-supplier=Verical, ComponentLink3Description=https://datasheet.ciiva.com/26924/getdatasheetpartid-640571-26924035.pdf?src-supplier=Verical, ComponentLink3URL=https://datasheet.ciiva.com/26924/getdatasheetpartid-640571-26924035.pdf?src-supplier=Verical, ComponentLink4Description=https://datasheet.ciiva.com/726/exh-726404.pdf?src-supplier=Digi-Key, ComponentLink4URL=https://datasheet.ciiva.com/726/exh-726404.pdf?src-supplier=Digi-Key, Connector Type=Header, Contact Finish - Mating=TIN, Contact Material=Brass, Contact Plating=Tin,Lead,Copper, Contact Shape=Square, Contact Type="Male Pin", Created By=Kaptanyum, Depth=5.75mm, Fastening Type=Detent, Gender=Male, Housing Material=Polyamide, Insulation Color=Natural, Insulation Material=Nylon, Lead Free="Lead Free", Lead Pitch=2.5mm, Length=12.4mm, Mated Stacking Heights=9.8mm, Material=Polyamide, Max Current Rating=3A, Max Voltage Rating (DC)=250V, Mounting Technology="Through Hole", Number of Contacts=4, Number of Positions=4, Number of Rows=1, Orientation=Straight, Packaging=Bulk, Pitch=2.5mm, Pricing="1=0.1585, 10=0.1388, 25=0.1373, 50=0.1359, 100=0.0728 (USD)", Reach SVHC Compliant=No, RoHS=Yes, Series=XH, Stock=46264, Supplier="Arrow Electronics", Supplier Part Number=B4B-XH-A(LF)(SN), Termination=Solder, Voltage Rating=250V, Voltage Rating (AC)=250V, Wire/Cable Gauge=22AWG
J2: library part "HEADER 1x2", "Header for PCB", Color=Natural, Contact Resistance=20mR, Current Rating=3A, Flammability Rating="UL94 V-0", Housing Color=White, Insulation Resistance=1GR, Manufacturer=JST, Manufacturer Part Number=B4B-XH-A(LF)(SN), Max Operating Temperature=85°C, Max Voltage Rating (AC)=250V, Min Operating Temperature=-25°C, Category="Headers and Wire Housings", ComponentLink1Description=https://datasheet.ciiva.com/16203/b4b-xh-alfsn-16203642.pdf?src-supplier=Future+Electronics, ComponentLink1URL=https://datasheet.ciiva.com/16203/b4b-xh-alfsn-16203642.pdf?src-supplier=Future+Electronics, ComponentLink2Description=https://datasheet.ciiva.com/26894/getdatasheetpartid-455616-26894787.pdf?src-supplier=Verical, ComponentLink2URL=https://datasheet.ciiva.com/26894/getdatasheetpartid-455616-26894787.pdf?src-supplier=Verical, ComponentLink3Description=https://datasheet.ciiva.com/26924/getdatasheetpartid-640571-26924035.pdf?src-supplier=Verical, ComponentLink3URL=https://datasheet.ciiva.com/26924/getdatasheetpartid-640571-26924035.pdf?src-supplier=Verical, ComponentLink4Description=https://datasheet.ciiva.com/726/exh-726404.pdf?src-supplier=Digi-Key, ComponentLink4URL=https://datasheet.ciiva.com/726/exh-726404.pdf?src-supplier=Digi-Key, Connector Type=Header, Contact Finish - Mating=TIN, Contact Material=Brass, Contact Plating=Tin,Lead,Copper, Contact Shape=Square, Contact Type="Male Pin", Created By=Kaptanyum, Depth=5.75mm, Fastening Type=Detent, Gender=Male, Housing Material=Polyamide, Insulation Color=Natural, Insulation Material=Nylon, Lead Free="Lead Free", Lead Pitch=2.5mm, Length=12.4mm, Mated Stacking Heights=9.8mm, Material=Polyamide, Max Current Rating=3A, Max Voltage Rating (DC)=250V, Mounting Technology="Through Hole", Number of Contacts=4, Number of Positions=4, Number of Rows=1, Orientation=Straight, Packaging=Bulk, Pitch=2.5mm, Pricing="1=0.1585, 10=0.1388, 25=0.1373, 50=0.1359, 100=0.0728 (USD)", Reach SVHC Compliant=No, RoHS=Yes, Series=XH, Stock=46264, Supplier="Arrow Electronics", Supplier Part Number=B4B-XH-A(LF)(SN), Termination=Solder, Voltage Rating=250V, Voltage Rating (AC)=250V, Wire/Cable Gauge=22AWG
J3 J6 J8: library part "HEADER 1x3", "Header for PCB", Color=Natural, Contact Resistance=20mR, Current Rating=3A, Flammability Rating="UL94 V-0", Housing Color=White, Insulation Resistance=1GR, Manufacturer=JST, Manufacturer Part Number=B4B-XH-A(LF)(SN), Max Operating Temperature=85°C, Max Voltage Rating (AC)=250V, Min Operating Temperature=-25°C, Category="Headers and Wire Housings", ComponentLink1Description=https://datasheet.ciiva.com/16203/b4b-xh-alfsn-16203642.pdf?src-supplier=Future+Electronics, ComponentLink1URL=https://datasheet.ciiva.com/16203/b4b-xh-alfsn-16203642.pdf?src-supplier=Future+Electronics, ComponentLink2Description=https://datasheet.ciiva.com/26894/getdatasheetpartid-455616-26894787.pdf?src-supplier=Verical, ComponentLink2URL=https://datasheet.ciiva.com/26894/getdatasheetpartid-455616-26894787.pdf?src-supplier=Verical, ComponentLink3Description=https://datasheet.ciiva.com/26924/getdatasheetpartid-640571-26924035.pdf?src-supplier=Verical, ComponentLink3URL=https://datasheet.ciiva.com/26924/getdatasheetpartid-640571-26924035.pdf?src-supplier=Verical, ComponentLink4Description=https://datasheet.ciiva.com/726/exh-726404.pdf?src-supplier=Digi-Key, ComponentLink4URL=https://datasheet.ciiva.com/726/exh-726404.pdf?src-supplier=Digi-Key, Connector Type=Header, Contact Finish - Mating=TIN, Contact Material=Brass, Contact Plating=Tin,Lead,Copper, Contact Shape=Square, Contact Type="Male Pin", Created By=Kaptanyum, Depth=5.75mm, Fastening Type=Detent, Gender=Male, Housing Material=Polyamide, Insulation Color=Natural, Insulation Material=Nylon, Lead Free="Lead Free", Lead Pitch=2.5mm, Length=12.4mm, Mated Stacking Heights=9.8mm, Material=Polyamide, Max Current Rating=3A, Max Voltage Rating (DC)=250V, Mounting Technology="Through Hole", Number of Contacts=4, Number of Positions=4, Number of Rows=1, Orientation=Straight, Packaging=Bulk, Pitch=2.5mm, Pricing="1=0.1585, 10=0.1388, 25=0.1373, 50=0.1359, 100=0.0728 (USD)", Reach SVHC Compliant=No, RoHS=Yes, Series=XH, Stock=46264, Supplier="Arrow Electronics", Supplier Part Number=B4B-XH-A(LF)(SN), Termination=Solder, Voltage Rating=250V, Voltage Rating (AC)=250V, Wire/Cable Gauge=22AWG
J4 J5: library part "SCREW TERMINAL", "7.62mm 2 POS", Created By=Kaptanyum
J7: library part "HEADER 1x4", "Header for PCB", Color=Natural, Contact Resistance=20mR, Current Rating=3A, Flammability Rating="UL94 V-0", Housing Color=White, Insulation Resistance=1GR, Manufacturer=JST, Manufacturer Part Number=B4B-XH-A(LF)(SN), Max Operating Temperature=85°C, Max Voltage Rating (AC)=250V, Min Operating Temperature=-25°C, Category="Headers and Wire Housings", ComponentLink1Description=https://datasheet.ciiva.com/16203/b4b-xh-alfsn-16203642.pdf?src-supplier=Future+Electronics, ComponentLink1URL=https://datasheet.ciiva.com/16203/b4b-xh-alfsn-16203642.pdf?src-supplier=Future+Electronics, ComponentLink2Description=https://datasheet.ciiva.com/26894/getdatasheetpartid-455616-26894787.pdf?src-supplier=Verical, ComponentLink2URL=https://datasheet.ciiva.com/26894/getdatasheetpartid-455616-26894787.pdf?src-supplier=Verical, ComponentLink3Description=https://datasheet.ciiva.com/26924/getdatasheetpartid-640571-26924035.pdf?src-supplier=Verical, ComponentLink3URL=https://datasheet.ciiva.com/26924/getdatasheetpartid-640571-26924035.pdf?src-supplier=Verical, ComponentLink4Description=https://datasheet.ciiva.com/726/exh-726404.pdf?src-supplier=Digi-Key, ComponentLink4URL=https://datasheet.ciiva.com/726/exh-726404.pdf?src-supplier=Digi-Key, Connector Type=Header, Contact Finish - Mating=TIN, Contact Material=Brass, Contact Plating=Tin,Lead,Copper, Contact Shape=Square, Contact Type="Male Pin", Created By=Kaptanyum, Depth=5.75mm, Fastening Type=Detent, Gender=Male, Housing Material=Polyamide, Insulation Color=Natural, Insulation Material=Nylon, Lead Free="Lead Free", Lead Pitch=2.5mm, Length=12.4mm, Mated Stacking Heights=9.8mm, Material=Polyamide, Max Current Rating=3A, Max Voltage Rating (DC)=250V, Mounting Technology="Through Hole", Number of Contacts=4, Number of Positions=4, Number of Rows=1, Orientation=Straight, Packaging=Bulk, Pitch=2.5mm, Pricing="1=0.1585, 10=0.1388, 25=0.1373, 50=0.1359, 100=0.0728 (USD)", Reach SVHC Compliant=No, RoHS=Yes, Series=XH, Stock=46264, Supplier="Arrow Electronics", Supplier Part Number=B4B-XH-A(LF)(SN), Termination=Solder, Voltage Rating=250V, Voltage Rating (AC)=250V, Wire/Cable Gauge=22AWG
L1: library part "INDUCTOR SMD", "Inductor Power Shielded Wirewound", Current Rating=3A, Inductance Tolerance=20%, Manufacturer=Bourns, Manufacturer Part Number=SRR1260-330M, Max Operating Temperature=125°C, Min Operating Temperature=-40°C, Saturation Current=2.8A, Self Resonant Frequency=9.97MHz, Category="Fixed Inductors", ComponentLink1Description=http://www.farnell.com/datasheets/2251090.pdf?src-supplier=Farnell, ComponentLink1URL=http://www.farnell.com/datasheets/2251090.pdf?src-supplier=Farnell, Created By=Kaptanyum, Packaging=10Packaging, Pins=2NUMBER, Pricing="600=0.4391, 1200=0.4292 (USD)", Q Factor=27NUMBER, RMS Current (Irms)=3A, RoHS=Yes, RoHS Compliant=Yes, Stock=16200, Supplier="Arrow Electronics", Supplier Part Number=SRR1260-330M
Q1 Q2: "MOSFET N-ch, 100V 28A"
R1 R2 R3 R4 R5 R6 R7: library part "RES 1206", "SMD Chip Resistor", Case Code (Imperial)=1206, Case Code (Metric)=3216, Manufacturer=Yageo, Manufacturer Part Number=RC1206FR-074K7L, Max Operating Temperature=155°C, Min Operating Temperature=-55°C, Power Rating=250mW, Resistance Tolerance=1%, Resistor Type="Thick Film", Supplier Part Number=2668689, Temperature Coefficient=100ppm/°C, Voltage Rating=200V, Case/Package=1206, Category="Chip SMD Resistors", Created By=Kaptanyum, Lead Free="Lead Free", Packaging="Tape and Reel", Pins=2, Pricing="5000=0.0048, 25000=0.0045, 100000=0.0043, 250000=0.0041, 625000=0.0038 (USD)", Reach SVHC Compliant=Unknown, RoHS=Yes, RoHS Compliant=Yes, Series=RC02H, Stock=240000, Supplier="Future Electronics", Tolerance=1%, Voltage Rating (AC)=200V, Voltage Rating (DC)=200V, Width=1.6mm
R8 R9 R11 R12 R13 R14 R15 R16 R17 R18 R19 R20 R21 R22 R23 R24 R25 R26 R27 R28 R29 R30 R31: library part "RES 0603", "SMD Chip Resistor", Case Code (Imperial)=0603, Case Code (Metric)=1608, Manufacturer=Yageo, Manufacturer Part Number=AC0603FR-071KL, Max Operating Temperature=155°C, Max Power Dissipation=100mW, Min Operating Temperature=-55°C, Package Quantity=1, Ratings=AEC-Q200, Supplier Part Number=1029290, Temperature Coefficient=100ppm/°C, Tolerance=1%, Voltage Rating=50V, Case/Package=0603, Category="Chip SMD Resistors", ComponentLink1Description=https://datasheet.ciiva.com/5558/pyu-ac-51-rohs-l-2-5558269.pdf?src-supplier=Mouser, ComponentLink1URL=https://datasheet.ciiva.com/5558/pyu-ac-51-rohs-l-2-5558269.pdf?src-supplier=Mouser, Created By=Kaptanyum, Features="Moisture Resistant,Automotive AEC-Q200,Anti-Sulfur", Height=0.022inch, Lead Free="Lead Free", Length=0.063inch, Number of Terminations=2, Packaging="Tape and Reel", Power Rating=100mW, Pricing="5000=0.0021, 25000=0.0019, 150000=0.0018, 500000=0.0017, 1500000=0.0016 (USD)", RoHS=Yes, RoHS Compliant=Yes, Series=AC, Stock=1025000, Supplier="Future Electronics", Termination=SMD/SMT, Width=0.031inch
R10: library part "RES 2512", "SMD Chip Resistor", Case Code (Imperial)=1206, Case Code (Metric)=3216, Manufacturer=Yageo, Manufacturer Part Number=RC1206FR-074K7L, Max Operating Temperature=155°C, Min Operating Temperature=-55°C, Power Rating=250mW, Resistance Tolerance=1%, Resistor Type="Thick Film", Supplier Part Number=2668689, Temperature Coefficient=100ppm/°C, Voltage Rating=200V, Case/Package=1206, Category="Chip SMD Resistors", Created By=Kaptanyum, Lead Free="Lead Free", Packaging="Tape and Reel", Pins=2, Pricing="5000=0.0048, 25000=0.0045, 100000=0.0043, 250000=0.0041, 625000=0.0038 (USD)", Reach SVHC Compliant=Unknown, RoHS=Yes, RoHS Compliant=Yes, Series=RC02H, Stock=240000, Supplier="Future Electronics", Tolerance=1%, Voltage Rating (AC)=200V, Voltage Rating (DC)=200V, Width=1.6mm
RJ1: library part "RJ14 SOCKET", "6P6C RJ11, RJ12, RJ14, RJ25"
RT1: library part "NTC 0603", "Thermistor NTC", Case Code (Imperial)=0603, Case Code (Metric)=1608, Manufacturer=Panasonic, Manufacturer Part Number=ERT-J1VG103FA, Max Operating Temperature=125°C, Max Power Dissipation=100mW, Min Operating Temperature=-40°C, Package Quantity=4000, Resistance Tolerance=1%, Supplier Part Number=667-ERT-J1VG103FA, Accuracy=1%, Case/Package=0603, Category=Thermistors, Created By=Kaptanyum, Depth=0.8mm, Height=0.8mm, Lead Free=5697LeadFree, Length=1.6mm, Mounting Technology="Surface Mount", Packaging="Tape and Reel", Pins=2, Power Rating=100mW, Pricing="1=0.2, 10=0.141, 50=0.141, 100=0.12, 1000=0.09, 10000=0.077 (USD)", Radiation Hardening=No, Reach SVHC Compliant=No, RoHS=Yes, RoHS Compliant=Yes, Series=ERT-J, Stock=91891, Supplier=Mouser, Termination=SMD/SMT, Tolerance=1%, Width=800um
SW1: "Switch 6mm x 3.5mm"
U1: "Cell Balance, Cell Monitoring", Case/Package=TSSOP, Manufacturer="Texas Instruments", Manufacturer Part Number=BQ77908ADBTR, Max Operating Temperature=85°C, Max Supply Voltage=35V, Min Operating Temperature=-25°C, Min Supply Voltage=5.6V, Package Quantity=2000, Supplier Part Number=296-36571-2-ND, Category="Battery Management", ComponentLink1Description=https://datasheet.ciiva.com/29610/bq77908a-29610033.pdf?src-supplier=Digi-Key, ComponentLink1URL=https://datasheet.ciiva.com/29610/bq77908a-29610033.pdf?src-supplier=Digi-Key, ComponentLink2Description=https://datasheet.ciiva.com/3214/bq77908a-3214679.pdf?src-supplier=Avnet, ComponentLink2URL=https://datasheet.ciiva.com/3214/bq77908a-3214679.pdf?src-supplier=Avnet, Contact Plating=Gold, Created By=Kaptanyum, Fault Protection="Over Current,Over Temperature,Short Circuit,Over/Under Voltage", Interface=I2C, Lead Free="Lead Free", Packaging="Tape and Reel", Pins=38, Pricing="2000=6.86865 (USD)", Radiation Hardening=No, RoHS=Yes, RoHS Compliant=Yes, Series=-, Supplier=Digi-Key
U2 U3 U4: "Op-Amp Gen 2-ch"
U5: "Linear Voltage Regulator", Created By=Kaptanyum
U6: "Buck Regulator", Case/Package=TO-263-6, Manufacturer="TI National Semiconductor", Manufacturer Part Number=LM2575SX-5.0/NOPB, Max Operating Temperature=125°C, Max Supply Voltage=40V, Min Input Voltage=4V, Min Operating Temperature=-40°C, Nominal Output Voltage=5V, Output Current=1A, Quiescent Current=10mA, Supplier Part Number=LM2575SX-5.0/NOPBDKR-ND, Switching Frequency=52kHz, Category="Voltage Regulators - Switching", ComponentLink1Description=https://datasheet.ciiva.com/30513/1289299-30513966.pdf?src-supplier=Jameco, ComponentLink1URL=https://datasheet.ciiva.com/30513/1289299-30513966.pdf?src-supplier=Jameco, ComponentLink2Description=https://datasheet.ciiva.com/41457/001013723-da-01-en-ic-reg-bu-lm2575sx-5-0-nopb-to-263-5-tid-41457574.pdf?src-supplier=Conrad, ComponentLink2URL=https://datasheet.ciiva.com/41457/001013723-da-01-en-ic-reg-bu-lm2575sx-5-0-nopb-to-263-5-tid-41457574.pdf?src-supplier=Conrad, ComponentLink3Description=https://datasheet.ciiva.com/6606/lm1575-6606205.pdf?src-supplier=Digi-Key, ComponentLink3URL=https://datasheet.ciiva.com/6606/lm1575-6606205.pdf?src-supplier=Digi-Key, ComponentLink4Description=https://datasheet.ciiva.com/6606/lm1575-6606150.pdf?src-supplier=Digi-Key, ComponentLink4URL=https://datasheet.ciiva.com/6606/lm1575-6606150.pdf?src-supplier=Digi-Key, ComponentLink5Description=https://datasheet.ciiva.com/6606/lm1575-6606201.pdf?src-supplier=Digi-Key, ComponentLink5URL=https://datasheet.ciiva.com/6606/lm1575-6606201.pdf?src-supplier=Digi-Key, Created By=Kaptanyum, Efficiency=77%, Lead Free="Contains Lead", Mounting Technology="Surface Mount", Number of Outputs=1, Output Type=Fixed, Output Voltage=5V, Packaging="Tape and Reel", Pins=5, Pricing="1=4.18, 10=3.752, 25=3.5472, 100=3.0744, 250=2.91672 (USD)", Reach SVHC Compliant=No, RoHS=Yes, RoHS Compliant=Yes, Series="SIMPLE SWITCHER®", Supplier=Digi-Key, Synchronous Rectifier=No
U7 U8: "Quad Channel Single ADC", Case/Package=VSSOP, Manufacturer="Texas Instruments", Manufacturer Part Number=ADS1015IDGST, Max Operating Temperature=125°C, Max Power Dissipation=900uW, Max Supply Voltage=5.5V, Min Operating Temperature=-40°C, Min Supply Voltage=2V, Operating Supply Voltage=3.3V, Package Quantity=1, Supplier Part Number=595-ADS1015IDGST, Supply Current=150uA, Category="Analog to Digital Converters (ADCs)", ComponentLink1Description=https://datasheet.ciiva.com/1595/ads1015-1595834.pdf?src-supplier=Newark, ComponentLink1URL=https://datasheet.ciiva.com/1595/ads1015-1595834.pdf?src-supplier=Newark, ComponentLink2Description=https://datasheet.ciiva.com/1704/1788973-1704263.pdf?src-supplier=Element14, ComponentLink2URL=https://datasheet.ciiva.com/1704/1788973-1704263.pdf?src-supplier=Element14, ComponentLink3Description=https://datasheet.ciiva.com/22696/1788973-22696408.pdf?src-supplier=Element14, ComponentLink3URL=https://datasheet.ciiva.com/22696/1788973-22696408.pdf?src-supplier=Element14, ComponentLink4Description=https://datasheet.ciiva.com/1303/ads1013-1303154.pdf?src-supplier=Digi-Key, ComponentLink4URL=https://datasheet.ciiva.com/1303/ads1013-1303154.pdf?src-supplier=Digi-Key, ComponentLink5Description=https://datasheet.ciiva.com/1303/ads1013-1303153.pdf?src-supplier=Digi-Key, ComponentLink5URL=https://datasheet.ciiva.com/1303/ads1013-1303153.pdf?src-supplier=Digi-Key, ComponentLink6Description=https://datasheet.ciiva.com/6666/ads1013-6666392.pdf?src-supplier=Digi-Key, ComponentLink6URL=https://datasheet.ciiva.com/6666/ads1013-6666392.pdf?src-supplier=Digi-Key, ComponentLink7Description=https://datasheet.ciiva.com/3038/sbas473c-3038712.pdf?src-supplier=Avnet, ComponentLink7URL=https://datasheet.ciiva.com/3038/sbas473c-3038712.pdf?src-supplier=Avnet, Contact Plating=Gold, Conversion Rate=3300S/s, Created By=Kaptanyum, Height=1.02mm, Integral Nonlinearity (INL)=0.5LSB, Interface=I2C, Lead Free="Lead Free", Length=3mm, Max Supply Voltage (DC)=5.5V, Min Supply Voltage (DC)=2V, Number of A/D Converters=1, Number of Bits=12, Number of Channels=4, Number of Converters=1, Number of Elements=1, Number of Inputs=4, Packaging="Tape and Reel", Pins=10, Polarity=Bipolar, Power Dissipation=900uW, Pricing="1=3.53, 10=3, 50=3, 100=2.59, 1000=1.86, 10000=1.77 (USD)", Radiation Hardening=No, Reach SVHC Compliant=No, Resolution=12b, RoHS=Yes, RoHS Compliant=Yes, Sampling Rate=3.3KS/s, Series=-, Stock=16249, Supplier=Mouser, Supply Type=Single, Termination=SMD/SMT, Width=3mm
U9: "MCU 32-bit STM32F ARM Cortex M3", Case/Package=LQFP, Clock Frequency=72MHz, Manufacturer=STMicroelectronics, Manufacturer Part Number=STM32F103C6T6A, Max Operating Temperature=85°C, Max Supply Voltage=3.6V, Min Operating Temperature=-40°C, Min Supply Voltage=2V, Package Quantity=1500, Supplier Part Number=511-STM32F103C6T6A, Category=Microcontrollers, ComponentLink1Description=https://datasheet.ciiva.com/15122/getdatasheetpartid-69879-15122075.pdf?src-supplier=Verical, ComponentLink1URL=https://datasheet.ciiva.com/15122/getdatasheetpartid-69879-15122075.pdf?src-supplier=Verical, ComponentLink2Description=https://datasheet.ciiva.com/14100/pustm-arm-microcont-stm32f103-en-14100507.pdf?src-supplier=Distrelec, ComponentLink2URL=https://datasheet.ciiva.com/14100/pustm-arm-microcont-stm32f103-en-14100507.pdf?src-supplier=Distrelec, Core Architecture=ARM, Created By=Kaptanyum, Data Bus Width=32b, Height=1.4mm, Interface=I2C,SPI,USART, Lead Free="Lead Free", Length=7mm, Memory Format=FLASH, Memory Size=32KB, Number of ADC Channels=10, Number of I/Os=37, Number of Timers/Counters=3, Packaging=Tray, Pins=48, Pricing="1=6.08, 10=4.69, 50=4.69, 100=4.47, 1000=3.21, 10000=3.04 (USD)", RAM Size=10KB, RoHS=Yes, RoHS Compliant=Yes, Series=STM32F103C6, Stock=2889, Supplier=Mouser, Weight=0.006409oz, Width=7mm
U10: "CAN Transceiver", Manufacturer=Microchip, Manufacturer Part Number=MCP2551T-E/SN, Category="Interface ICs", ComponentLink1Description=https://datasheet.ciiva.com/1604/657417-1604797.pdf?src-supplier=Newark, ComponentLink1URL=https://datasheet.ciiva.com/1604/657417-1604797.pdf?src-supplier=Newark, ComponentLink2Description=https://datasheet.ciiva.com/1767/21667f-1767467.pdf?src-supplier=Digi-Key, ComponentLink2URL=https://datasheet.ciiva.com/1767/21667f-1767467.pdf?src-supplier=Digi-Key, ComponentLink3Description=https://datasheet.ciiva.com/29718/filehandler-aspxddocname-en011797-29718437.pdf?src-supplier=Digi-Key, ComponentLink3URL=https://datasheet.ciiva.com/29718/filehandler-aspxddocname-en011797-29718437.pdf?src-supplier=Digi-Key, ComponentLink4Description=https://datasheet.ciiva.com/29718/filehandler-aspxddocname-en011797-29718438.pdf?src-supplier=Digi-Key, ComponentLink4URL=https://datasheet.ciiva.com/29718/filehandler-aspxddocname-en011797-29718438.pdf?src-supplier=Digi-Key, ComponentLink5Description=https://datasheet.ciiva.com/16290/filehandler-aspxddocname-en011797-16290269.pdf?src-supplier=Future+Electronics, ComponentLink5URL=https://datasheet.ciiva.com/16290/filehandler-aspxddocname-en011797-16290269.pdf?src-supplier=Future+Electronics, ComponentLink6Description=https://datasheet.ciiva.com/16983/70048433-16983254.pdf?src-supplier=Allied+Electronics, ComponentLink6URL=https://datasheet.ciiva.com/16983/70048433-16983254.pdf?src-supplier=Allied+Electronics, Created By=Kaptanyum, Pricing="1=1.574, 10=1.559, 25=1.496, 100=1.432, 250=1.369 (USD)", RoHS=Yes, Stock=440, Supplier="Arrow Electronics", Supplier Part Number=MCP2551T-E/SN
X1: "8 MHZ DIP"

## Free pads (board coordinates)
  round 2.018 hole 2.018 mask+0.05: M2(3,3) M2(3,67) M2(97,3) M2(97,67)

## Via types
v1: diameter 0.5/0.5 (per signal layer), hole 0.3, Top Layer to Bottom Layer, 170 vias

## Nets (pads, with @x,y where several pads share a name; then routed paths per layer and width w, separated by ;. In a path a pad name is that pad's centre, name@x,y a point inside that pad or via, vN(x,y) a via of type N, cw(c..) or ccw(c..) an arc to the next point about the centre after c; other vN are vias at no path point)
3V3: C27.1 C33.1 C34.1 C35.1 C36.1 C37.1 C39.1 J7.4 J8.1 R30.2 U5.2 U9.9 U9.24 U9.36 U9.48 | length 52.7
  Top Layer w0.254: U9.9 66.473,36.727 67.342,36.727 67.369,36.7 v1(68,36.7) ; U9.48 C37.1 ; v1(72.32,32.08) 73.38,32.08 C33.1 U9.24 ; U9.36 C35.1 ; v1(75.3,45.2) v1@75.3,45.25 ; v1(75.5,42.5) 76.5,42.5 C36.1 ; U5.2@76.95,46.9 U5.2@77.8,46.9
  Top Layer w0.406: v1(66.2,42.8) 66.218,42.818 66.218,43.818 C39.1 C37.1 ; R30.2 70.75,29.45 72.32,31.02 v1(72.32,32.08) ; J8.1 72.058,51.4 75.961,47.497 77.203,47.497 77.8,46.9 81,46.9 82.1,48 C27.1 ; C33.1 C34.1 81.15,32.15 82.1,33.1 J7.4 ; v1@75.3,45.25 U5.2@76.95,46.9 ; C35.1 C36.1
5V: C26.1 C28.1 C29.1 C30.1 L1.2 U5.3 U6.4 U7.1 U7.8 U8.8 U10.3 | length 70.1
  Top Layer w0.406: C28.1 C28.1@59.325,48.35 ; v1(61.2,46.9) 61.2,48.075 60.925,48.35 C28.1@59.325,48.35 ; U10.3 88.765,60.835 87.6,62 L1.2 77.95,57.95 75.5,55.5 U5.3 C26.1 73.1,55.9 72.8,56.2 61.445,56.2 61.207,55.962 61.207,54.5 U6.4 60.902,49.952 59.597,48.647 59.597,48.622 C28.1@59.325,48.35
  Bottom Layer w0.254: v1(11.3,57.2) 12.35,56.15 C29.1 14.481,56.15 14.663,55.968 14.663,55.303 14.845,55.121 15.921,55.121 16.077,55.277 16.077,56.077 U8.8 ; v1(11.6,45.4) 13.55,45.4 C30.1 15.284,45.45 16.077,46.243 16.077,46.977 U7.8 ; U7.1 17.1,42.025 17.123,42.002 19.74,42.002 19.937,42.2 v1(20.004,42.2)
AIN0: U4.7 U7.5 | length 9.9
  Bottom Layer w0.254: U7.5 15.1,41.508 15.249,41.359 22.16,41.359 22.665,41.864 22.665,42.162 22.838,42.335 U4.7
AIN1: U4.1 U7.4 | length 15.9
  Bottom Layer w0.254: U7.4 15.623,42.623 15.623,44.023 16.5,44.9 20.261,44.9 22.11,43.051 27.671,43.051 28.225,43.605 U4.1
AIN2: U3.7 U7.6 | length 48
  Bottom Layer w0.254: U7.6 15.077,47.023 15.077,47.623 10.4,52.3 10.4,58.7 11.44,59.74 29.638,59.74 30.01,59.368 30.01,50.481 29.399,49.87 27.801,49.87 27.571,49.64 27.571,48.83 27.72,48.681 28.451,48.681 28.6,48.532 U3.7
AIN3: U3.1 U8.4 | length 10.1
  Bottom Layer w0.254: U8.4 15.623,51.677 15.623,50.877 19.805,46.695 U3.1
AIN4: U2.7 U8.6 | length 21.1
  Bottom Layer w0.254: U8.6 15.123,56.123 15.123,58.423 16.059,59.359 29.48,59.359 29.629,59.21 29.629,56.587 29.48,56.438 28.773,56.438 U2.7
AIN5: U2.1 U8.7 | length 11.5
  Bottom Layer w0.254: U8.7 15.623,56.123 15.623,56.857 15.845,57.079 17.355,57.079 21.054,53.381 21.661,53.381 22.031,53.75 22.031,54.273 21.895,54.409 21.895,54.846 22.044,54.995 U2.1
BAT: C13.1 D9.1 D12.1 R17.1 U1.31 | length 53
  Top Layer w0.254: C13.1 36.187,48.613 37.5,47.3 37.5,45.4 v1(37.5,43.6) ; R17.1 40.65,60.6 v1(42.2,60.6) ; v1(49.6,45.6) 49.1,45.1 49.049,45.1 49.049,44.349 D12.1 49.6,44.2 50.7,43.1 50.7,37.939 50.939,37.7 D9.1
  Bottom Layer w0.254: v1(42.2,60.6) 42.2,60.2 36.9,54.9 36.9,47.6 37.5,47 v1(37.5,43.6) 47.6,43.6 v1(49.6,45.6)
BOOT0: J8.2 U9.44 | length 9.8
  Top Layer w0.254: J8.2 69.973,49.787 69.973,42.273 U9.44
CAN_H: RJ1.1 U10.7 | length 17.7
  Top Layer w0.254: RJ1.1 87.81,38.4 91.1,38.4 92.2,39.5 92.2,46.9 90.035,49.065 U10.7
CAN_L: RJ1.2 U10.6 | length 12